# Altium PCB PCB1.PcbDoc
Units mm, origin at the board's own origin, x right, y up, seen from the top; angles counter-clockwise.
Board outline 42.75 x 41.75 mm, 4 copper layers (L1 (Signal), L2 (GND), L3 (GND), L4 (Signal)), stack 1.57 mm thick; 44 components, 39 nets, 193 pads, 136 vias.
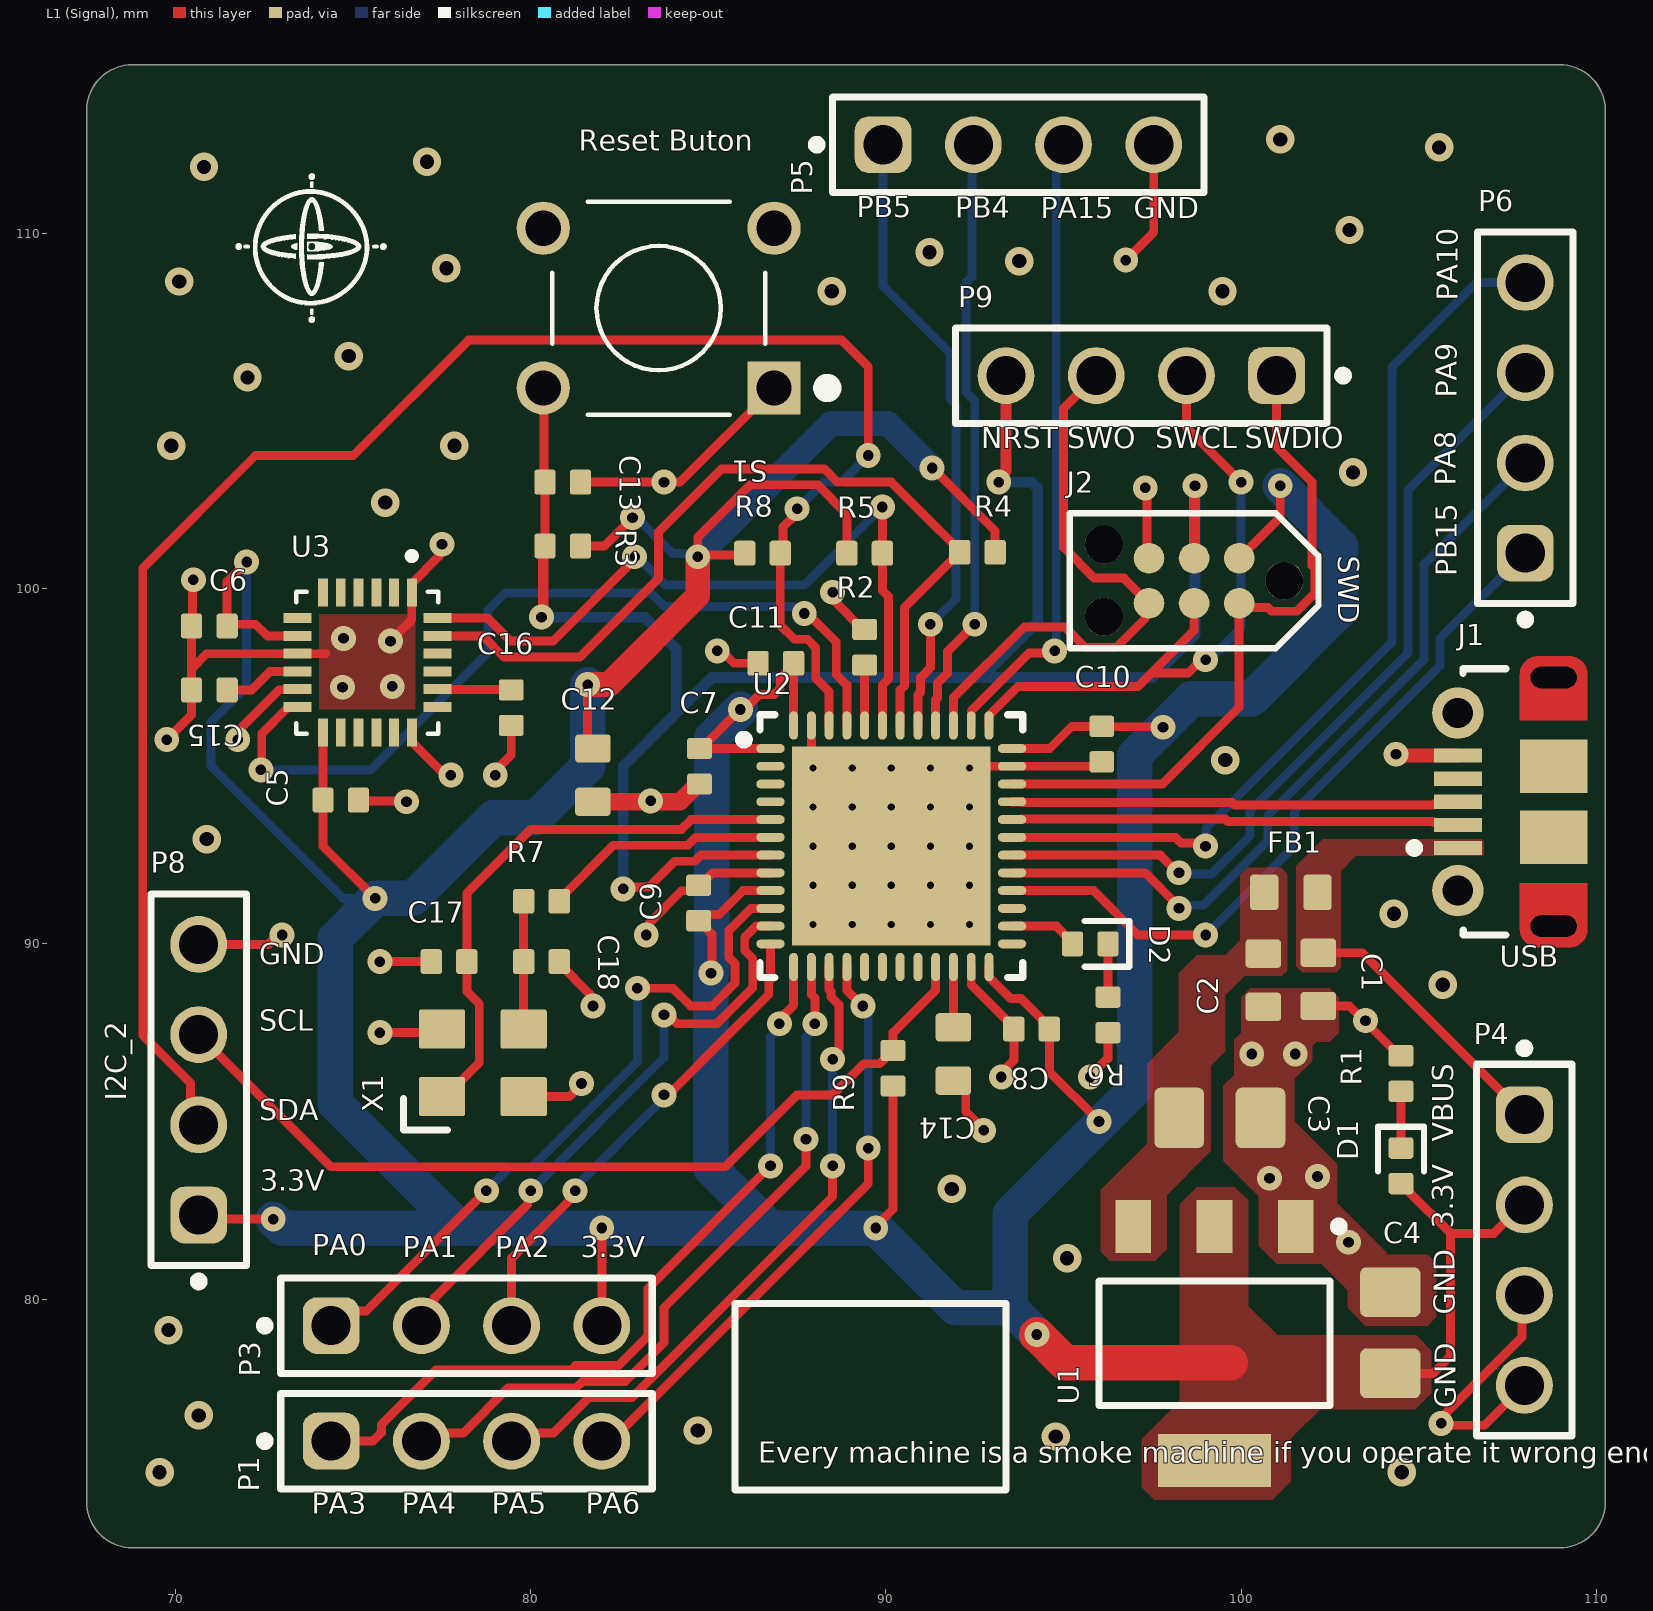
[diagram p0: L1 (Signal) view]
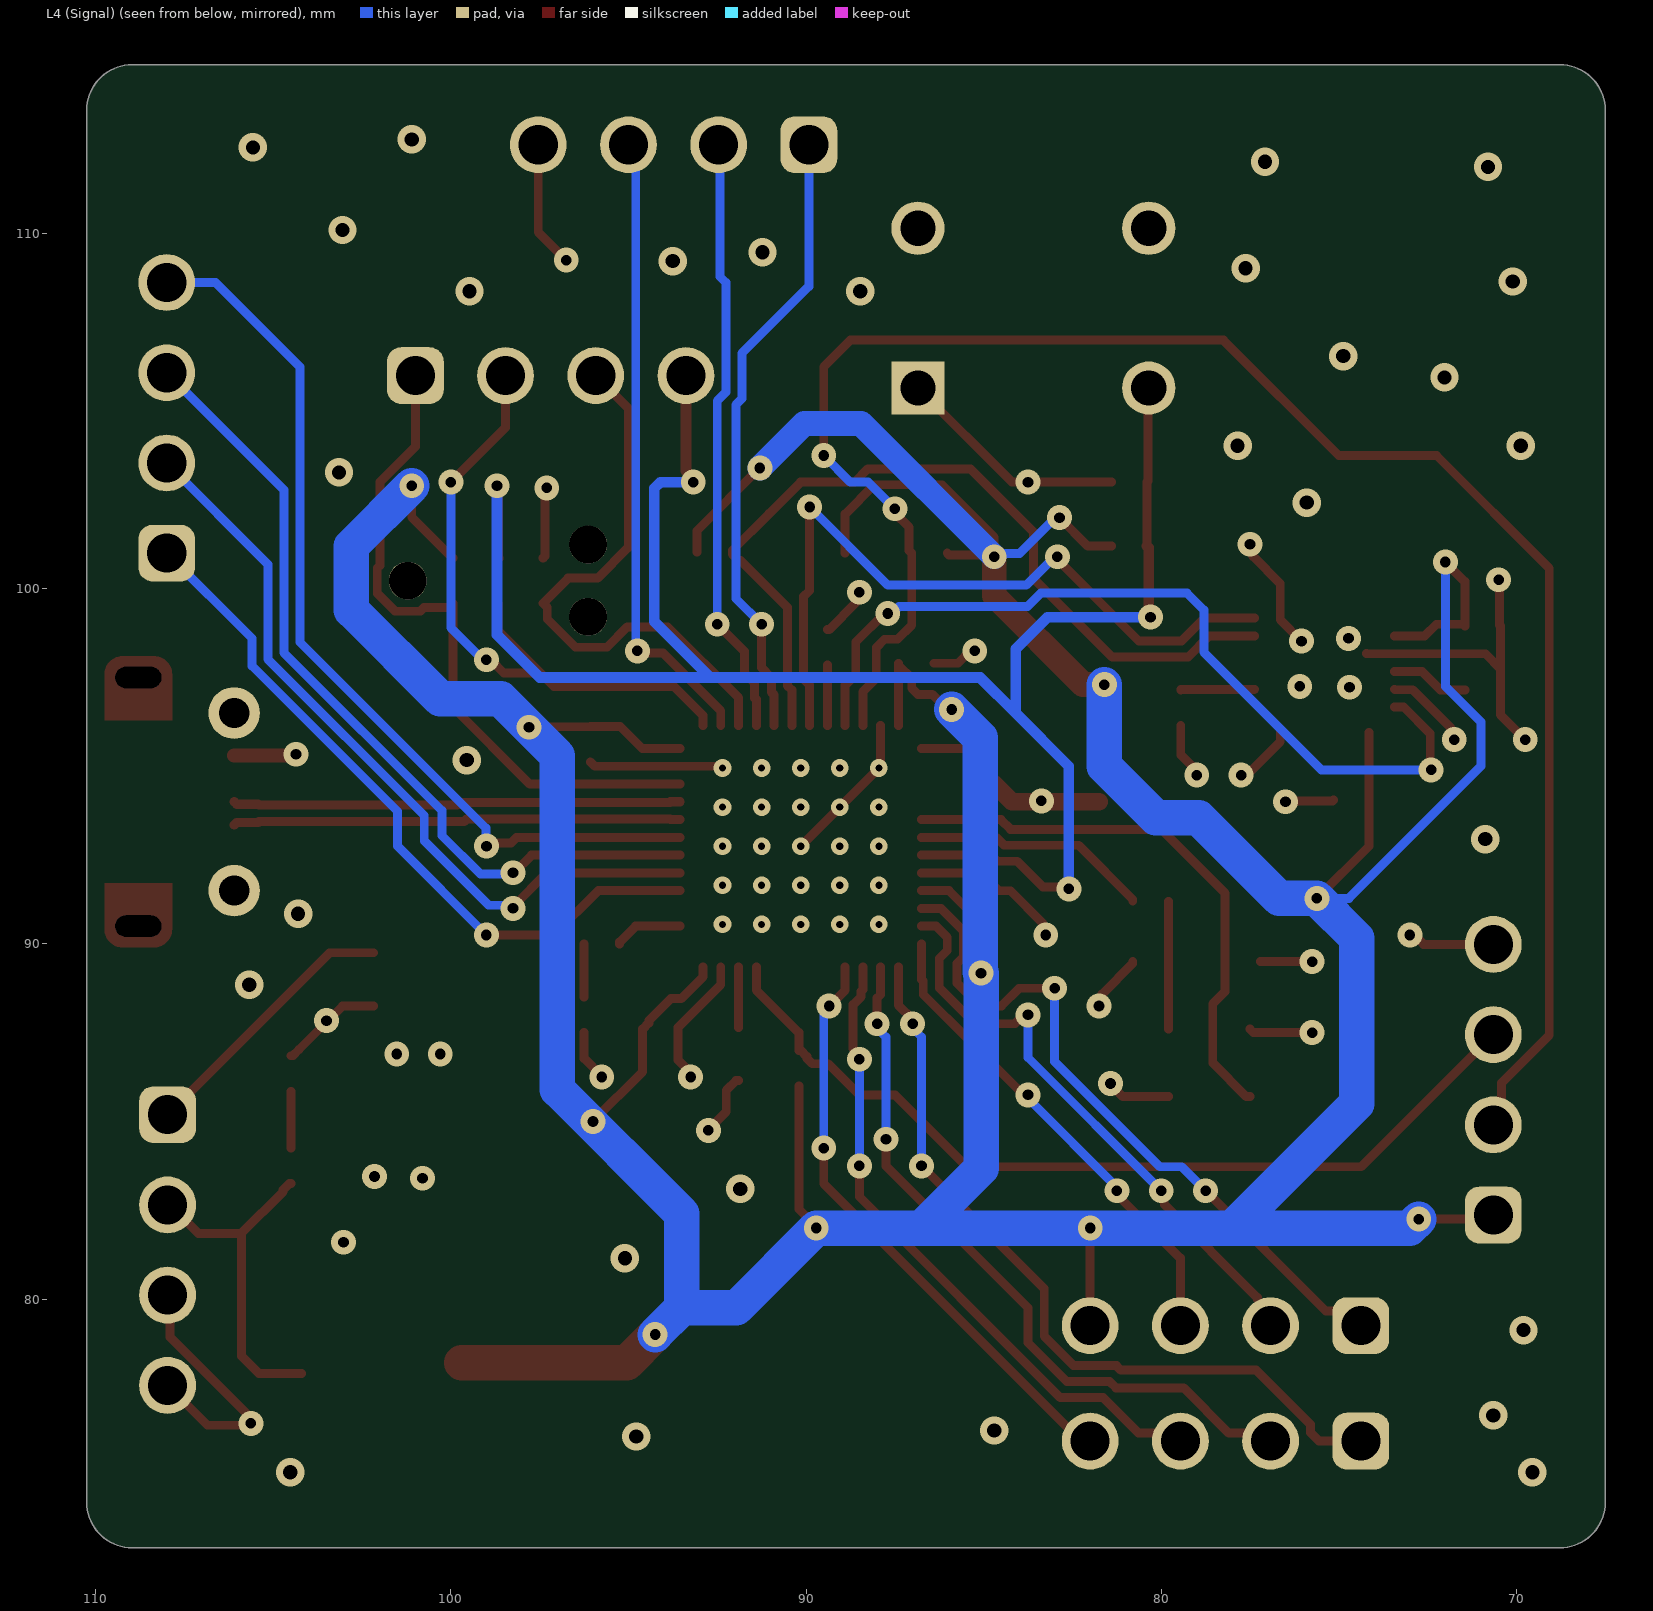
[diagram p1: L4 (Signal) view, seen from below]
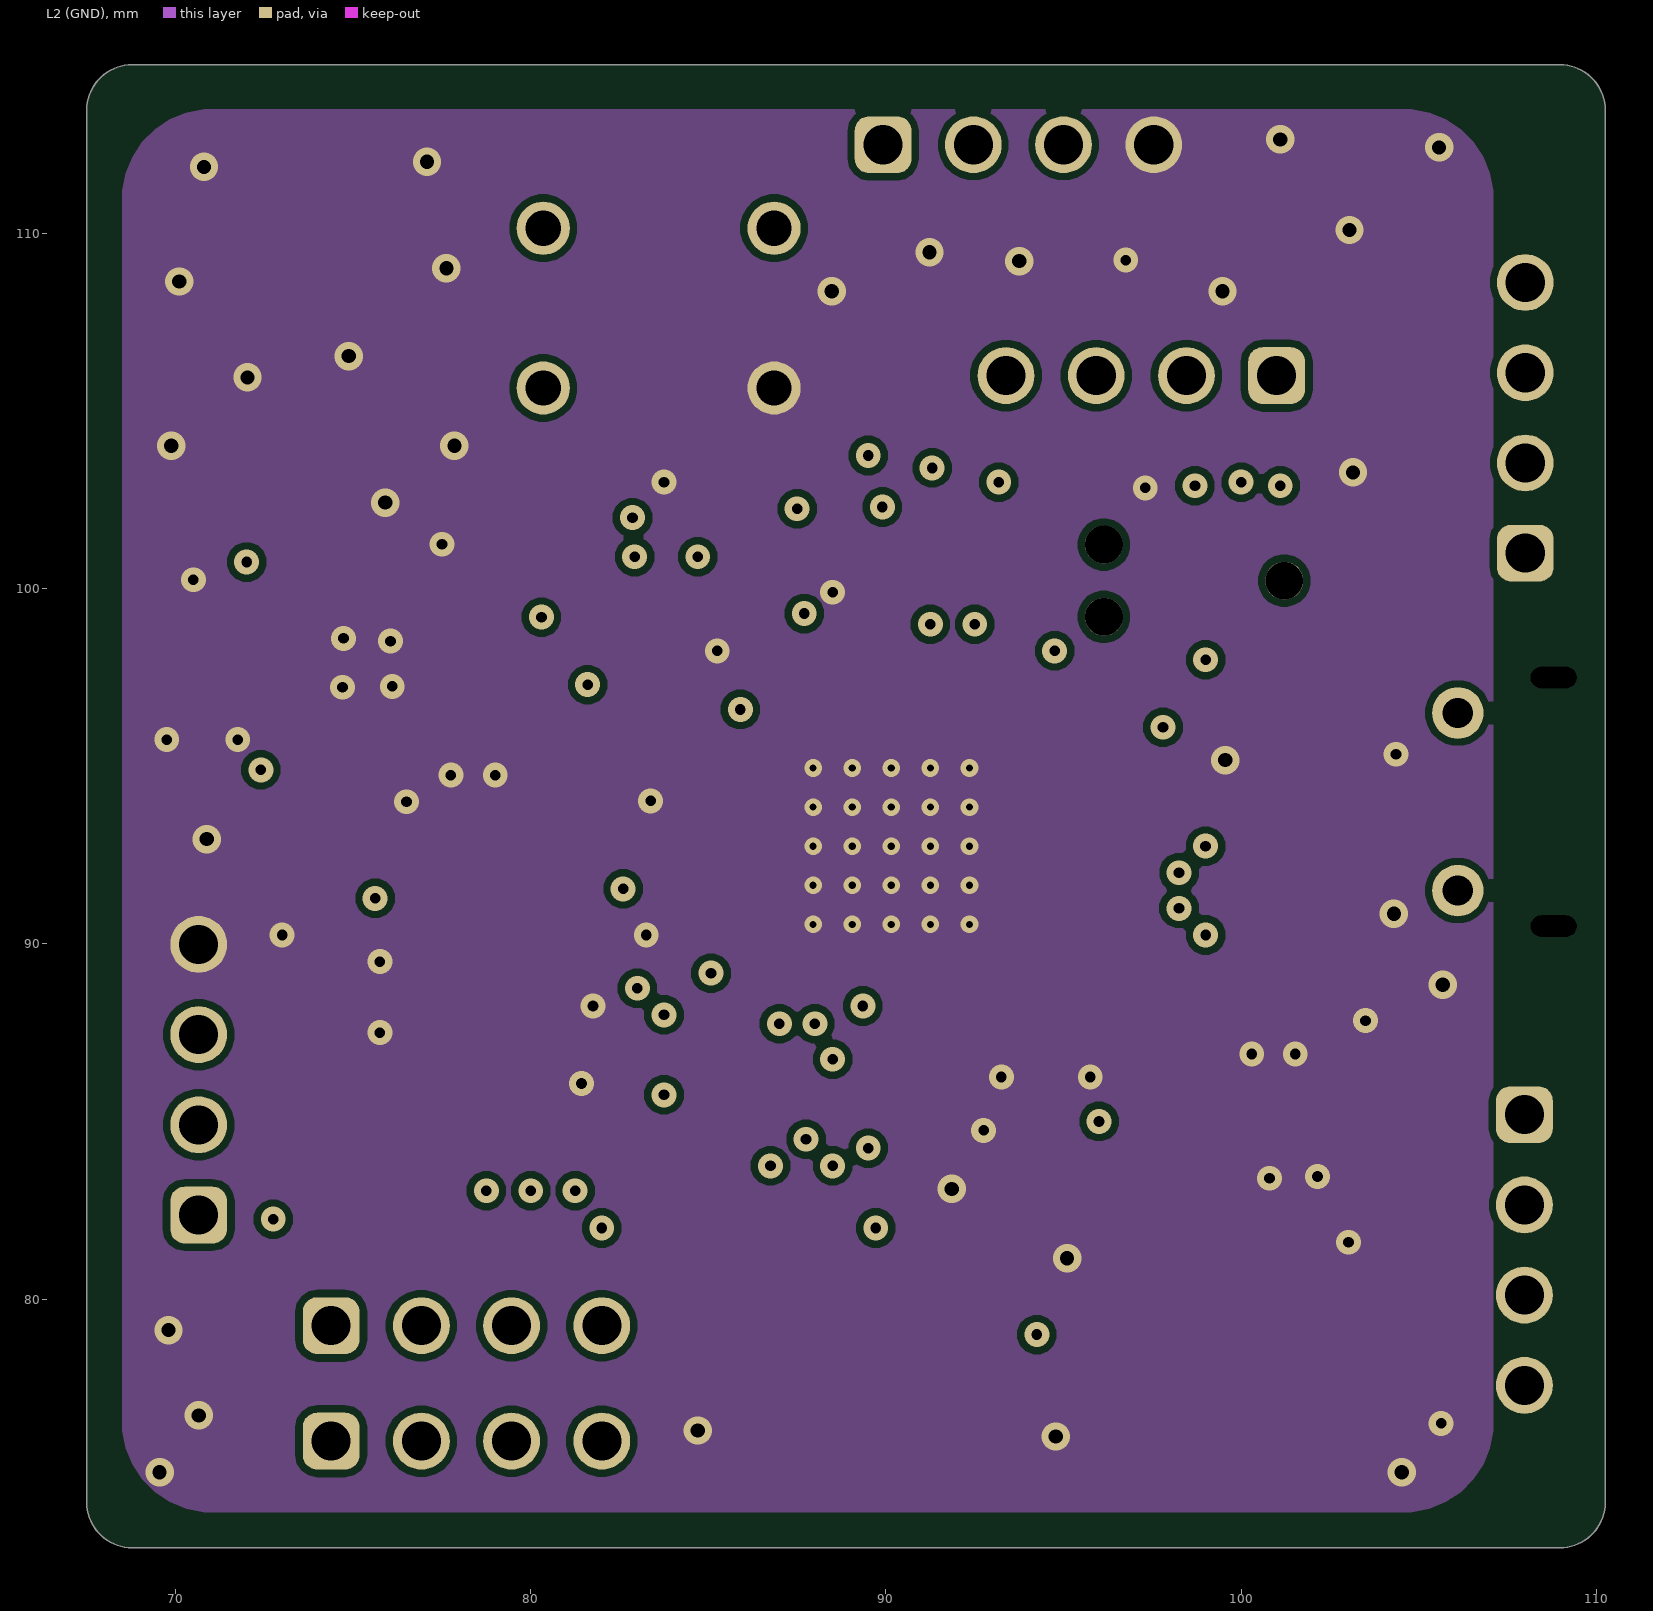
[diagram p2: L2 (GND)]
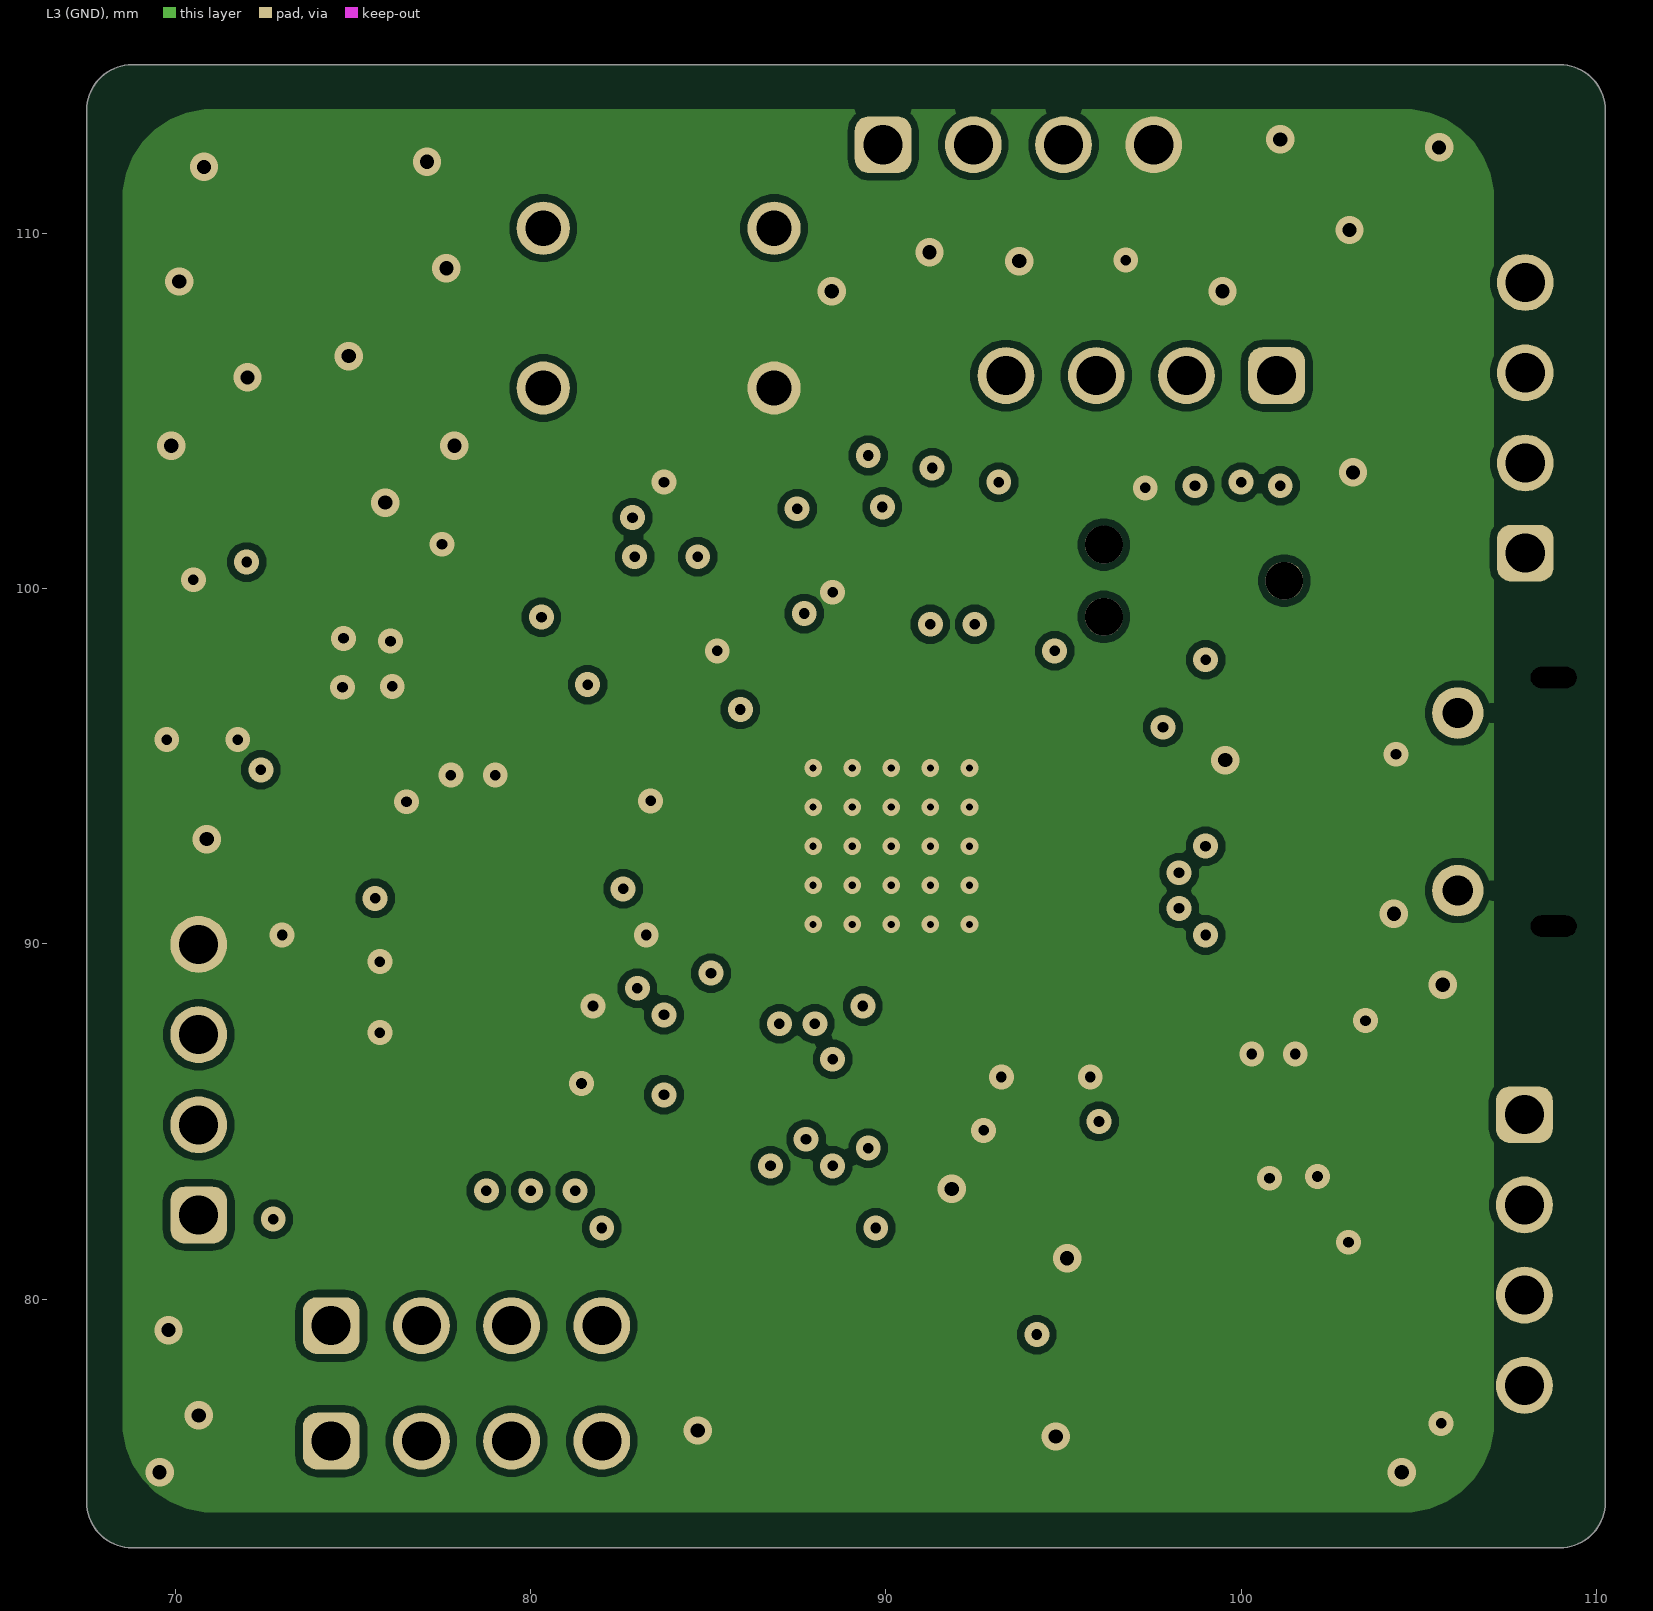
[diagram p3: L3 (GND)]
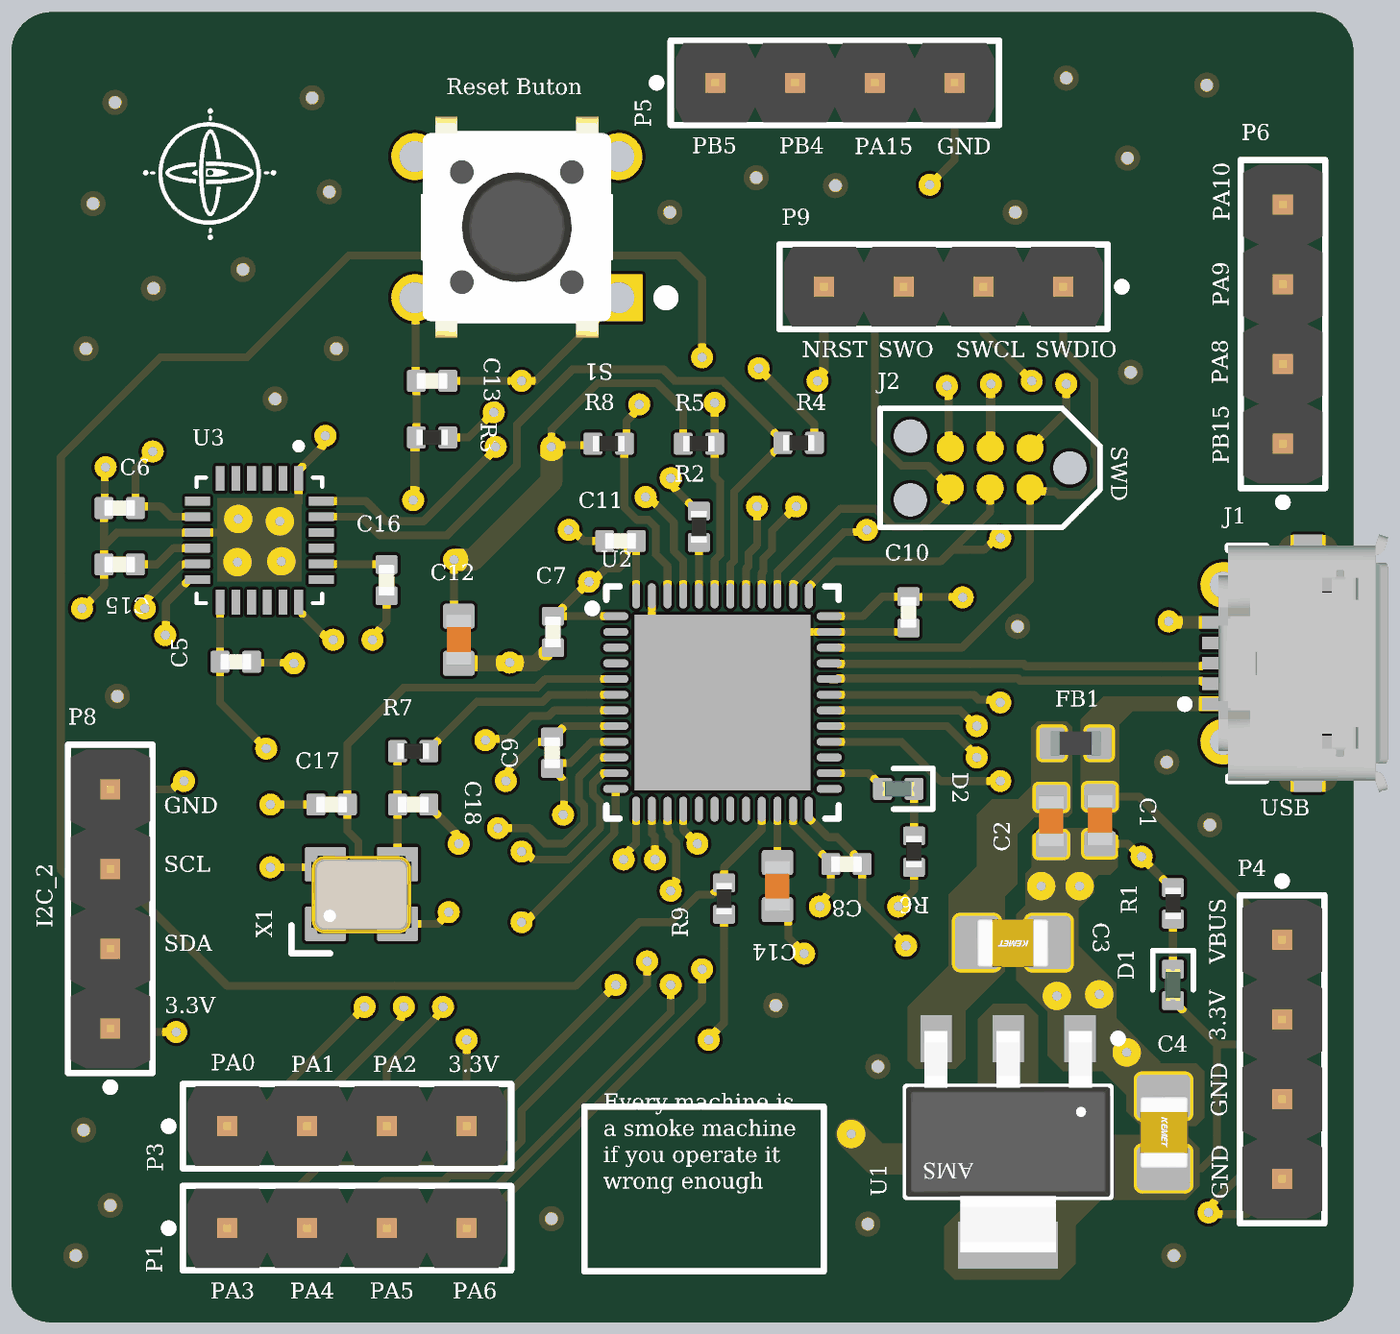
[diagram p4: 3D render of the assembled board from above, using the file's embedded part models]

## Layer stack, top to bottom
Top Solder: solder mask 0.0254, SM-001, Dk 4
L1 (Signal): signal copper 0.035
Dielectric 1: prepreg 0.2, PP-017, Dk 4.6
L2 (GND): signal copper 0.0175
Dielectric 3: core 1.065, Core-039, Dk 4.6
L3 (GND): signal copper 0.0175
Dielectric 5: prepreg 0.2, PP-017, Dk 4.6
L4 (Signal): signal copper 0.035
Bottom Solder: solder mask 0.0254, SM-001, Dk 4

## Board outline
68.77,73 cw(c68.77,74.27) 67.5,74.27 67.5,113.48 cw(c68.77,113.48) 68.77,114.75 108.98,114.75 cw(c108.98,113.48) 110.25,113.48 110.25,74.27 cw(c108.98,74.27) 108.98,73

## Design rules (kind name [scope] priority, off if disabled: settings)
Clearance [All] p1: gap=0.2 ignorepadtopadclearanceinfootprint=FALSE
DiffPairsRouting [All] p1: maxlimit=0.254 minlimit=0.203 mostfreqgap=0.254 toplayer_maxgap=0.203 toplayer_prefgap=0.203 toplayer_minwidth=0.26 toplayer_maxwidth=0.26 toplayer_prefwidth=0.26 bottomlayer_maxgap=0.203 bottomlayer_prefgap=0.203 bottomlayer_minwidth=0.26 bottomlayer_maxwidth=0.26 bottomlayer_prefwidth=0.26 impedanceprofiledriven=TRUE impedanceprofileid={49823D1B-6960-47C4-9E38-969958D2B06B} impedanceprofilevalue=90.000000 maxuncoupledlength=12.7
PolygonConnect [All] p1: connectstyle=Direct reliefconductorwidth=0.254 reliefentries=4 polygonreliefangle="90 Angle" airgapwidth=0.254
RoutingVias [All] p1: holewidth=0.3 width=0.7 viastyle="Through Hole" minholewidth=0.25 minwidth=0.5 maxholewidth=0.4 maxwidth=0.9
SolderMaskExpansion [All] p1: expansion=0.102 istentingtop=FALSE
UnRoutedNet [All] p1: checkbadconnections=TRUE
Width [All] p1: maxlimit=1 minlimit=0.2 preferedwidth=0.3 midlayer1_minwidth=0.254 midlayer1_maxwidth=0.254 midlayer1_prefwidth=0.254 midlayer2_minwidth=0.254 midlayer2_maxwidth=0.254 midlayer2_prefwidth=0.254 minimp=50.000000 maximp=50.000000 favimp=50.000000
28 further rules are at their usual default settings.

## Classes and differential pairs
differential pair class DIFF_USB: USB_D
differential pair USB_D: +USB_D_P -USB_D_N

## Components (designator, comment, footprint, x,y, rotation, side; value= is the part's Value field where it differs from the comment)
C1 "C0603 2.2u" CAP_0603 102.175,89 r90 top
C2 "C0603 2.2u" CAP_0603 100.625,88.975 r90 top
C3 "C0805 22uF" CAP_0805 99.4,85.1 r180 top
C4 "C0805 22uF" CAP_0805 104.2,79.05 r270 top
C5 "C0402 100nF" CAP_0402 74.65,94.05 r0 top
C6 "C0402 10nF" CAP_0402 70.95,98.95 r180 top
C7 "C0402 100nF" CAP_0402 84.75,95 r270 top
C8 "C0402 100nF" CAP_0402 94.1,87.6 r180 top
C9 "C0402 100nF" CAP_0402 84.725,91.15 r90 top
C10 "C0402 100nF" CAP_0402 96.075,95.625 r270 top
C11 "C0402 100nF" CAP_0402 86.9,97.9 r180 top
C12 "C0603 2.2u" CAP_0603 81.75,94.75 r90 top
C13 "C0402 100nF" CAP_0402 80.9,103 r180 top
C14 "C0603 2.2u" CAP_0603 91.9,86.9 r90 top
C15 "C0402 100nF" CAP_0402 70.95,97.15 r180 top
C16 "C0402 2.2nF" CAP_0402 79.45,96.65 r90 top
C17 "C0402" CAP_0402 77.7,89.5 r0 top
C18 "C0402" CAP_0402 80.3,89.5 r180 top
D1 "GREEN" LED_0402_GREEN 104.5,83.75 r90 top
D2 "BLUE" LED_0402_BLUE 95.75,90 r0 top
FB1 "FB0603 120R" FB_0603 101.4,91.45 r180 top
J1 "105017-0001" USB-MICRO-B_V 107.45,94 r90 top
J2 "TC2030-NL" TC2030-NL-FP 98.675,100.225 r180 top
P1 "61300411121" 61300411121 78.19,76 r0 top
P3 "61300411121" 61300411121 78.19,79.25 r0 top
P4 "61300411121" 61300411121 107.975,81.38 r270 top
P5 "61300411121" 61300411121 93.73,112.5 r0 top
P6 "61300411121" 61300411121 108,104.81 r90 top
P8 "61300411121" 61300411121 70.65,86.175 r90 top
P9 "61300411121" 61300411121 97.19,106 r180 top
R1 "R0402 1k" RES_0402 104.5,86.35 r270 top
R2 "R0402 10k" RES_0402 89.4,98.35 r270 top
R3 "R0402 10k" RES_0402 80.9,101.2 r0 top
R4 "R0402 2.2k" RES_0402 92.575,101.025 r0 top
R5 "R0402 2.2k" RES_0402 89.4,101 r180 top
R6 "R0402 1k" RES_0402 96.25,88 r90 top
R7 "R0402 0R" RES_0402 80.3,91.2 r0 top
R8 "R0402 2.2k" RES_0402 86.525,101 r180 top
R9 "R0402 2.2k" RES_0402 90.2,86.5 r270 top
S1 "FSM8JH" SW_FSM8JH 83.6,107.9 r180 top
U1 "AMS1117-3.3" FP-AMS1117-IPC_C 99.25,78.75 r270 top
U2 "STM32F411CEU6" STM-UFQFPN48_L 90.15,92.75 r0 top
U3 "MPU-6050" QFN50P400X400X95-24N 75.4,97.92 r270 top
X1 "24MHz" XTAL_3225 78.65,86.65 r0 top

## Footprints (in the part's own frame and the unit in brackets; to place one, negate y for a bottom-side part, rotate by r counter-clockwise, add the part's x,y. Pads: shape width x height; smd on the part's side, far side on the other; paste and mask are expansions set on the pad)
61300411121 [mm] "Pin Header, pitch 2.54 mm, THT, Vertical, single row, 4p"
  rrect50% 1.6x1.6 hole 1.1: 1(-3.81,0)
  round 1.6 hole 1.1: 2(-1.27,0) 3(1.27,0) 4(3.81,0)
  silkscreen extent -5.8,-1.35 5.23,1.35, body extent -5.08,-1.27 5.08,1.27, height 8.57
CAP_0402 [mm]
  rrect25% 0.6x0.7 smd: 1(-0.5,0) 2(0.5,0)
  body extent -0.5,-0.26 0.5,0.26, height 0.37
CAP_0603 [mm]
  rrect25% 0.8x1 smd: 1(-0.75,0) 2(0.75,0)
  body extent -0.8,-0.4 0.8,0.4, height 0.51
CAP_0805 [mm]
  rrect25% 1.4x1.7 smd: 1(-1.143,0) 2(1.143,0)
  body extent -1.15,-0.76 1.15,0.79, height 1.01
FB_0603 [mm]
  rrect25% 0.8x1 smd: 1(-0.75,0) 2(0.75,0)
  body extent -0.8,-0.4 0.8,0.4, height 0.81
FP-AMS1117-IPC_C [mm]
  rect 1.5x1 smd paste+0 mask+0: 1(-3.295,2.29) 2(-3.295,0) 3(-3.295,-2.29)
  rect 1.5x3.182 smd paste+0 mask+0: 4(3.295,0)
  silkscreen extent -3.42,-3.25 1.75,3.63, body extent -3.9,-3.35 3.9,3.35, height 0.25
LED_0402_BLUE [mm]
  rrect25% 0.6x0.7 smd: A(-0.5,0) K(0.5,0)
  silkscreen extent -0.15,-0.65 1.1,0.65, body extent -0.51,-0.25 0.51,0.25, height 0.45
LED_0402_GREEN [mm]
  rrect25% 0.6x0.7 smd: A(-0.5,0) K(0.5,0)
  silkscreen extent -0.15,-0.65 1.1,0.65, body extent -0.51,-0.25 0.51,0.25, height 0.45
QFN50P400X400X95-24N [mm] "QFN, 24-Leads, Body 4x4mm, Pitch 0.5mm, Thermal Pad 2.7x2.6mm"
  rect 0.79x0.28 smd: 1(-1.97,1.25) 2(-1.97,0.75) 3(-1.97,0.25) 4(-1.97,-0.25) 5(-1.97,-0.75) 6(-1.97,-1.25) 13(1.97,-1.25) 14(1.97,-0.75) 15(1.97,-0.25) 16(1.97,0.25) 17(1.97,0.75) 18(1.97,1.25)
  rect 0.28x0.79 smd: 7(-1.25,-1.97) 8(-0.75,-1.97) 9(-0.25,-1.97) 10(0.25,-1.97) 11(0.75,-1.97) 12(1.25,-1.97) 19(1.25,1.97) 20(0.75,1.97) 21(0.25,1.97) 22(-0.25,1.97) 23(-0.75,1.97) 24(-1.25,1.97)
  silkscreen extent -3.1,-2 2,2
RES_0402 [mm]
  rrect25% 0.6x0.7 smd: 1(-0.5,0) 2(0.5,0)
  body extent -0.5,-0.25 0.5,0.25, height 0.3
STM-UFQFPN48_L [mm] "QFN, 48-Leads, Body 7.1x7.1mm, Pitch 0.5mm, Thermal Pad 5.6x5.6mm, IPC High Density"
  oval 0.8x0.25 smd: 1(-3.4,2.75) 2(-3.4,2.25) 3(-3.4,1.75) 4(-3.4,1.25) 5(-3.4,0.75) 6(-3.4,0.25) 7(-3.4,-0.25) 8(-3.4,-0.75) 9(-3.4,-1.25) 10(-3.4,-1.75) 11(-3.4,-2.25) 12(-3.4,-2.75) 25(3.4,-2.75) 26(3.4,-2.25) 27(3.4,-1.75) 28(3.4,-1.25) 29(3.4,-0.75) 30(3.4,-0.25) 31(3.4,0.25) 32(3.4,0.75) 33(3.4,1.25) 34(3.4,1.75) 35(3.4,2.25) 36(3.4,2.75)
  oval 0.25x0.8 smd: 13(-2.75,-3.4) 14(-2.25,-3.4) 15(-1.75,-3.4) 16(-1.25,-3.4) 17(-0.75,-3.4) 18(-0.25,-3.4) 19(0.25,-3.4) 20(0.75,-3.4) 21(1.25,-3.4) 22(1.75,-3.4) 23(2.25,-3.4) 24(2.75,-3.4) 37(2.75,3.4) 38(2.25,3.4) 39(1.75,3.4) 40(1.25,3.4) 41(0.75,3.4) 42(0.25,3.4) 43(-0.25,3.4) 44(-0.75,3.4) 45(-1.25,3.4) 46(-1.75,3.4) 47(-2.25,3.4) 48(-2.75,3.4)
  rect 5.6x5.6 smd: 49(0,0)
  silkscreen extent -4.27,-3.7 3.7,3.7, body extent -3.55,-3.55 3.55,3.55, height 0.6
SW_FSM8JH [mm]
  rect 1.498x1.498 / inner round 1.498 / far side rect 1.498x1.498 hole 0.99: 1(-3.25,2.25)
  round 1.498 hole 0.99: 2(-3.25,-2.25) 3(3.25,2.25) 4(3.25,-2.25)
  silkscreen extent -4.95,-3 3,3, body extent -3,-3.95 3,3.95, height 9.5
TC2030-NL-FP [mil]
  round 33.98 smd paste-16.99: 1(-50,-25) 2(-50,25) 3(0,-25) 4(0,25) 5(50,-25) 6(50,25)
  round 42.01 hole 42.01 unplated: MH(-100,0) MH(100,-40) MH(100,40)
  silkscreen extent -138,-75 138,75
USB-MICRO-B_V [mm] "USB, MICRO B, Body 7.491x4.695 mm, Pitch 0.65 mm"
  rect 0.4x1.35 smd: 1(-1.3,1.35) 2(-0.65,1.35) 3(0,1.35) 4(0.65,1.35) 5(1.3,1.35)
  round 1.45 hole 0.85: 6(-2.5,1.35) 7(2.5,1.35)
  rrect50% 0x0 hole 0.6 slot 1.3 at 90 deg: 8(-3.5,-1.35) 11(3.5,-1.35)
  rect 1.5x1.9 smd: 9(-1,-1.35) 10(1,-1.35)
  L1 (Signal) circle w0.5: c3.6,-0.9 r0.25
  L1 (Signal) circle w0.5: c3.6,-1.8 r0.25
  L1 (Signal) circle w0.5: c-3.6,-0.9 r0.25
  L1 (Signal) circle w0.5: c-3.6,-1.8 r0.25
  L1 (Signal) region: -2.3,-2.3 -2.3,-0.4 -3.6,-0.4 -3.6,-2.3
  L1 (Signal) region: 2.3,-0.4 2.3,-2.3 3.6,-2.3 3.6,-0.4
  L1 (Signal) region: 3.6,-0.9 3.6,-1.8 4.1,-1.8 4.1,-0.9
  L1 (Signal) region: -3.6,-1.8 -3.6,-0.9 -4.1,-0.9 -4.1,-1.8
  silkscreen extent -3.75,-0.01 3.75,2.7, body extent -4.1,-3.9 4.1,1.5, height 2.67
XTAL_3225 [mm]
  rrect10% 1.3x1.1 smd: 1(-1.15,-0.95) 2(1.15,-0.95) 3(1.15,0.95) 4(-1.15,0.95)
  silkscreen extent -2.23,-1.89 -1,-1, body extent -1.6,-1.28 1.6,1.22, height 0.61

## Part data
C1 C2 C12 C14: library part CAP_0603, "Capacitor SMD 0603"
C3 C4: library part CAP_0805, "Capacitor SMD 0805 16V"
C5 C6 C7 C8 C9 C10 C11 C13 C15 C16: library part CAP_0402, "Capacitor SMD 0402"
C17 C18: library part CAP_0402, "Capacitor SMD 0402  / udemy'e göre 10pf"
D1: library part LED_0402_GREEN, "LED 0402 GREEN SMD"
D2: library part LED_0402_BLUE, "LED 0402 BLUE SMD"
FB1: library part FB_0603, "Ferrite Bead SMD 0603"
J1: library part CMP-2000-05827-1, "Micro-USB B Receptacle, Right Angle, Bottom Mount, Surface Mount, with Solder Tabs, -30 to 85 degC, 5-Pin USB, RoHS, Tape and Reel", Manufacturer=Molex, Package Description="5-Leads USB, Micro B, Body 7.5 x 5 mm, Pitch 0.65 mm", Package Reference=MICRO-B, Package Version="Rev. F, 12/2012", Standard Package=1, Voltage - Max=30V, 3D Model=105017-0001.stp, Catalog Drawings=1050170001, Category=Connectors,Interconnects, Circuits=5, Connector Type=USB-microB, Datasheet URL=http://www.molex.com/elqNow/elqRedir.htm?ref=http://www.molex.com/webdocs/datasheets/pdf/en-us/1050170001_IO_CONNECTORS.pdf, Datasheet Version=03/2016, Family=USB,DVI,HDMIConnectors, Featured Product=Micro-USBConnectorsUSBConnectors, Features=Shielded,SolderRetention, Gender=Receptacle, Ingress Protection=-, Manufacturer URL=http://www.molex.com/, Mating Products=WM17145-ND-CABLEMICROUSBBTOSTDA1.0MWM17147-ND-CABLEMICROUSBBTOSTDA2.0MWM17146-ND-CABLEMICROUSBBTOSTDA1.5M, Mounting Technology=SurfaceMount, Mounting Type=BoardCutout,SurfaceMount,RightAngle, Number of Contacts=5, Online Catalog=Molex-MicroUSB, Other Names=WM1399DKR, Package URL=http://www.molex.com/pdm_docs/sd/1050170001_sd.pdf, Packaging=Digi-Reel®, PCN Assembly/Origin=ResinSupplier21/Oct/2015, RoHS Information=1050170001CertofCompliance, Series=-, Specifications=-
J2: "Tag-Connect No-Solder SWD Debug Connector (No Legs) DO NOT PLACE", Manufacturer=Tag-Connect, Manufacturer Part Number=TC2030-NL-FP
P1 P3 P4 P5 P6 P8 P9: "WR-PHD Pin Header, THT, Vertical, pitch 2.54mm, 1 Row, 4P", Contact Resistance=20mOhm, Manufacturer="Wurth Elektronik", Operating Temperature Max=105°C, Operating Temperature Min=-40°C, Rated Current=3A, Withstanding Voltage=500V, Working Voltage=250V, Category="Board-to-Board Connectors", ComponentLink1Description="Website Link", ComponentLink1URL=https://www.we-online.com/redexpert/article/61300411121?ad, ComponentLink2Description="Datasheet Link", ComponentLink2URL=https://www.we-online.com/redexpert/spec/61300411121?ad, Gender="Pin Header", Manufacturer Part Number=61300411121, Match Code=WR-PHD, Mount="Through Hole", Number of Pins=4, Number of Rows=1, Orientation=Vertical, Packaging=Bag, Pitch=2.54mm
R1 R2 R3 R4 R5 R6 R7 R8 R9: library part RES_0402, "Resistor SMD 0402"
S1: "Tactile Switch SPST-NO Top Actuated Through Hole", Package=None, Availability="In Stock", Check_prices=https://www.snapeda.com/parts/FSM8JH/TE+Connectivity+ALCOSWITCH+Switches/view-part/?ref=eda, MF="TE Connectivity", MP=FSM8JH, Price=None, SnapEDA_Link=https://www.snapeda.com/parts/FSM8JH/TE+Connectivity+ALCOSWITCH+Switches/view-part/?ref=snap
U1: library part CMP-209535-000001-1, "LDO Voltage Regulators 1A, 3.3V", Dropout Voltage=1.1V, Manufacturer="Advanced Monolithic Systems", Max Junction Temp=+125°C, Max Power Dissipation=1.2W, Max Supply Voltage=15V, Nominal Supply Current=5mA, Output Current=1A, Output Voltage=3.3V, Package=AMS1117, Temperature="-40°C to +125°C", Temperature Range Low=-40°C, Automotive=No, Category=IC, ComponentLink2Description=Datasheet, ComponentLink2URL=http://www.advanced-monolithic.com/pdf/ds1117.pdf, Device Class L1="Integrated Circuits (ICs)", Device Class L2="Power Management ICs", Device Class L3="Voltage Regulators - Linear", Height=1.8mm, Ipc Land Pattern Name=SOT229P700X180-4, Lead Free=Yes, Manufacturer Part Number=AMS1117-3.3, Number Of Outputs=1, Octopart=https://octopart.com/ams1117-3.3-advanced+monolithic+systems-25899300, Output Type=Fixed, RoHS=TRUE, Standoff Height=0.64mm, Temperature Range High=+125°C
U2: library part CMP-0243-00165-1, "ARM Cortex-M4 32-bit MCU+FPU, 512 KB Flash, 128 KB RAM, 36 I/Os, 48-Pin UFQFPN, -40 to 85 degC, Tray", I/Os (High Current)=36, Operating Frequency(F) (Processor speed) (MHz)=100, Package Description=UFQFPN48, Package Reference="48-Pin Ultra Thin Fine Pitch Quad Flat No-Lead, 7 x 7 x 0.6 mm Body, 0.5 mm Pitch, Exposed Pad", Supply Voltage(Vcc) min (V)=1.7, ComponentLink1Description="Manufacturer URL", ComponentLink1URL=http://www.st.com/, ComponentLink2Description=Datasheet, ComponentLink2URL=http://www.st.com/st-web-ui/static/active/en/resource/technical/document/datasheet/DM00115249.pdf, Core="ARM Cortex-M4", DatasheetVersion="Rev. 6", FLASH Size (Prog) (kB)=512, Internal RAM Size (kB)=128, Mounting Technology="Surface Mount", Packing=Tray
U3: "MPU-6050 series Accelerometer, Gyroscope, 3 Axis Sensor Evaluation Board", Package="QFN-24 InvenSense", Check_prices=https://www.snapeda.com/parts/MPU-6050/TDK+InvenSense/view-part/?ref=eda, MF="TDK InvenSense", MP=MPU-6050, SnapEDA_Link=https://www.snapeda.com/parts/MPU-6050/TDK+InvenSense/view-part/?ref=snap
X1: library part TSX-3225_24.0000MF15X-AC, "Crystal SMD 24MHz 10PPM 7pF 3225", Manufacturer=Epson, Manufacturer Part Number="TSX-3225 24.0000MF15X-AC"

## Via types
v1: diameter 0.7, hole 0.3, L1 (Signal) to L4 (Signal), 82 vias
v2: diameter 0.8, hole 0.4, L1 (Signal) to L4 (Signal), tented both sides, 29 vias
v3: diameter 0.5, hole 0.2, L1 (Signal) to L4 (Signal), 25 vias

## Nets (pads, with @x,y where several pads share a name; then routed paths per layer and width w, separated by ;. In a path a pad name is that pad's centre, name@x,y a point inside that pad or via, vN(x,y) a via of type N, cw(c..) or ccw(c..) an arc to the next point about the centre after c; other vN are vias at no path point)
+3.3V: C4.2 C5.1 C6.1 C7.1 C8.1 C9.1 C10.1 C11.1 C12.2 D1.A J2.1 P3.4 P4.2 P8.1 R3.2 R4.2 R5.2 R8.2 R9.2 U1.2 U1.4 U2.1 U2.9 U2.24 U2.36 U2.48 U3.8 U3.13 | length 190.3
  L1 (Signal) w0.25: P8.1 70.765,82.25 v1(72.75,82.25) ; v1(72,100.75) 71.45,100.2 C6.1 71.5,99 72.25,99 72.58,98.67 U3.8 ; U3.13 C5.1 74.15,92.75 v1(75.618,91.282) ; R3.2 82.064,101.2 v1(82.864,102) ; v1(81.6,97.3) 81.6,95.65 C12.2 ; P3.4 v1(82,82) ; v1(85.073,89.176) 85.1,89.203 85.1,90.275 84.95,90.425 84.95,90.475 84.775,90.65 C9.1 84.9,90.825 85.3,90.825 85.975,91.5 U2.9 ; R8.2 85.975,100.95 84.75,100.95 v1(84.7,100.9) 84.7,101.45 86.175,102.925 88.075,102.925 88.9,102.1 R5.2 ; U2.1 C7.1 84.8,95.5 v1(85.9,96.6) 86.022,96.6 86.447,97.025 86.85,97.025 87.025,97.2 87.025,97.475 C11.1@87.4,97.85 ; U2.48 C11.1@87.4,97.85 ; C11.1 C11.1@87.4,97.85 ; v1(89.711,82) 89.711,82.047 90.2,82.536 R9.2 ; v1(91.3,103.4) 93.075,101.625 R4.2 ; U2.24 92.9,89.075 93.517,88.458 93.808,88.458 94.425,87.841 94.425,87.775 C8.1 94.6,86.4 v1(96,85) ; U2.36 94.612,95.5 95.238,96.125 C10.1 96.087,96.113 97.788,96.113 v1(97.8,96.1) ; J2.1 101.1,102.015 v1(101.1,102.9) ; C4.2@104.207,77.9 C4.2 105.407,77.907 105.9,78.4 105.9,81.85 ; D1.A 104.55,83.25 104.725,83.075 104.725,83.025 105.9,81.85 ; P4.2 107.913,82.65 107.113,81.85 105.9,81.85
  L1 (Signal) w0.7: v1(81.6,97.3) 82.2,97.3 84.7,99.8 v1(84.7,100.9)
  L1 (Signal) w1: v1(94.25,79) 95.05,78.2 99.7,78.2
  L4 (Signal) w0.25: v1(72,100.75) 72,97.25 71,96.25 71,95 74.718,91.282 v1(75.618,91.282) ; v1@82.75,102 v1(82.864,102) 82.978,102 83.992,100.986 84.614,100.986 v1(84.7,100.9)
  L4 (Signal) w0.7: v1(84.7,100.9) 88.45,104.65 90.05,104.65 v1(91.3,103.4)
  L4 (Signal) w1: v1(72.75,82.25) 73,82 78,82 ; v1(81.6,97.3) 81.6,95 80.15,93.55 78.95,93.55 76.682,91.282 v1(75.618,91.282) 74.5,90.164 74.5,85.5 78,82 ; v1(85.073,89.176) 85.073,83.677 86.75,82 ; v1@85.1,89.2 85.1,95.8 v1(85.9,96.6) ; v1(94.25,79) 93.5,79.75 ; v1(101.1,102.9) 102.8,101.2 102.8,99.4 100.3,96.9 98.6,96.9 97,95.3 97,85.9 93.5,82.4 93.5,79.75 ; 78,82 v1(82,82) 86.75,82 ; 86.75,82 v1(89.711,82) 91.961,79.75 93.5,79.75
+5V: C2.2 C3.2 FB1.2 U1.3
GND: C1.1 C2.1 C3.1 C4.1 C5.2 C6.2 C7.2 C8.2 C9.2 C10.2 C11.2 C12.1 C13.1 C14.1 C15.2 C16.1 C17.1 C18.1 J1.5 J2.5 P4.3 P4.4 P5.4 P8.4 R1.1 R2.1 R6.1 S1.1 U1.1 U2.8 U2.23 U2.35 U2.47 U2.49 U3.1 U3.9 U3.11 U3.18 X1.2 X1.4 | length 78.1
  L1 (Signal) w0.25: v1(69.75,95.75) 70.45,96.45 C15.2 70.45,97.75 ; v1(70.5,100.25) 70.475,100.225 70.475,98.975 C6.2 70.45,97.75 ; P8.4 72.613,89.985 72.878,90.25 v1(73,90.25) ; v1(71.75,95.75) 71.836,95.836 71.836,96.071 72.92,97.155 73.415,97.155 U3.11 ; 74.225,98.175 74.22,98.17 U3.9 70.87,98.17 70.45,97.75 ; C5.2 75.175,94.025 76.475,94.025 v1(76.5,94) ; v1(75.75,87.5) 77.4,87.5 X1.4 ; v1(75.75,89.5) C17.1 ; v1(76.05,98.525) 76.65,99.125 76.65,100.145 77.414,100.909 77.414,101.164 v1(77.5,101.25) ; U3.18 76.65,95.695 77.509,94.836 77.664,94.836 v1(77.75,94.75) ; v1(79,94.75) 79,94.872 79.45,95.322 C16.1 ; X1.2 81.078,85.7 81.43,86.051 v1(81.43,86.07) ; C18.1 80.8,89.45 81.664,88.586 81.664,88.336 v1(81.75,88.25) ; C13.1 84.2,103 S1.1 ; v1(83.25,90.25) 83.336,90.336 83.336,90.586 84.244,91.494 84.569,91.494 C9.2 84.775,91.65 85.125,92 U2.8 ; v1(85.25,98.25) 85.372,98.25 85.722,97.9 C11.2 ; U2.47 87.9,95 v3(87.95,94.95) v3(89.05,93.85) v3(90.15,92.75) ; v1(88.5,99.9) 88.586,99.814 88.586,99.614 89.35,98.85 R2.1 ; C14.1 91.972,86.15 92.247,85.875 92.247,85.272 92.75,84.769 v1(92.75,84.75) ; v3(92.35,94.95) 92.4,95 U2.35 95.95,95 C10.2 ; U2.23 92.4,88.85 93.6,87.65 C8.2 93.6,86.722 93.25,86.372 v1(93.25,86.25) ; v1(95.75,86.25) 95.75,86.275 96.25,86.775 R6.1 ; v1(96.75,109.25) 97.54,110.04 P5.4 ; v1(97.3,102.839) 97.353,102.787 97.353,100.912 J2.5 ; C1.1 103.05,88.25 104.275,87.025 104.45,86.85 R1.1 ; P4.4 106.852,76.447 105.685,76.447 105.554,76.579 107.91,78.935 107.91,80.045 P4.3
  L1 (Signal) w0.4: v1(104.362,95.338) 104.4,95.3 J1.5
  L1 (Signal) w0.5: C12.1 84.2,94 84.7,94.5 C7.2
  other v1: 105.632,76.5 103.025,81.6 100.8,83.4 102.15,83.45 100.3,86.9 101.525,86.9 103.5,87.839 83.375,94.025 74.7,97.225 76.1,97.25 74.725,98.6 83.75,103
  other v2: 69.55,75.125 104.525,75.125 94.779,76.131 84.7,76.3 70.65,76.725 69.8,79.125 95.1,81.15 91.85,83.1 105.675,88.85 104.3,90.85 70.875,92.95 99.55,95.175 75.9,102.425 103.15,103.275 69.875,104.025 77.85,104.025 72.025,105.95 74.875,106.55 88.475,108.375 99.475,108.375 70.1,108.65 77.625,109.025 93.75,109.225 91.225,109.475 103.05,110.1 70.8,111.875 77.077,112.02 105.575,112.425 101.1,112.65
  other v3: 87.95,90.55 89.05,90.55 90.15,90.55 91.25,90.55 92.35,90.55 87.95,91.65 89.05,91.65 90.15,91.65 91.25,91.65 92.35,91.65 87.95,92.75 89.05,92.75 91.25,92.75 92.35,92.75 87.95,93.85 90.15,93.85 91.25,93.85 92.35,93.85 89.05,94.95 90.15,94.95 91.25,94.95
"IMU CPOUT": C16.2 U3.20 | length 2.1
  L1 (Signal) w0.25: U3.20 77.38,97.16 79.44,97.16 C16.2
"IMU REG OUT": C15.1 U3.10 | length 2.2
  L1 (Signal) w0.25: C15.1 72.14,97.15 72.66,97.67 U3.10
IMU_INT: U2.45 U3.12 | length 24.3
  L1 (Signal) w0.25: v1(72.4,94.9) 72.425,94.925 72.425,95.92 73.175,96.67 U3.12 ; v1(87.7,99.3) 87.8,99.3 88.6,98.5 88.6,97.584 88.9,97.284 U2.45
  L4 (Signal) w0.25: v1(72.4,94.9) 75.49,94.9 78.8,98.21 78.8,99.4 79.275,99.875 83.389,99.875 83.764,99.5 87.378,99.5 87.578,99.3 v1(87.7,99.3)
IMU_SCL: R4.1 U2.42 U3.23 | length 24.5
  L1 (Signal) w0.25: U3.23 78.651,98.67 79.246,98.075 81.375,98.075 83.6,100.3 83.6,101.6 85.375,103.375 88.261,103.375 88.636,103 90.155,103 91.04,102.115 91.04,102.11 92.075,101.075 92.075,100.975 91.9,100.8 91.85,100.8 90.525,99.475 90.525,97.273 90.4,97.148 U2.42
IMU_SDA: R5.1 U2.43 U3.24 | length 21.4
  L1 (Signal) w0.25: U3.24 78.787,99.17 79.432,98.525 80.625,98.525 82.925,100.825 v1(82.925,100.9) ; U2.43 89.9,97.284 89.95,97.334 90.075,97.459 90.075,99.775 89.9,99.95 R5.1 v1(89.9,102.3)
  L4 (Signal) w0.25: v1(82.925,100.9) 83,100.9 83.8,100.1 87.7,100.1 v1(89.9,102.3)
LED_PWR_K: D1.K R1.2 | length 1.6
  L1 (Signal) w0.25: D1.K R1.2
"MCU BOOT0": R2.2 U2.44 | length 1.7
  L1 (Signal) w0.25: U2.44 R2.2
"MCU NRST": C13.2 J2.3 P9.4 R3.1 S1.3 U2.7 | length 54.6
  L1 (Signal) w0.25: S1.3 80.375,105.625 80.375,103.025 C13.2 R3.1 ; v1(82.6,91.55) 82.646,91.596 83.325,91.596 84.054,92.325 84.611,92.325 84.786,92.5 U2.7
  L1 (Signal) w0.3: v1(80.3,99.2) 80.35,99.25 80.35,101.15 R3.1 ; v1(93.175,103) 93.175,103.108 93.38,103.313 P9.4 ; J2.3 98.687,100.872 98.687,102.887 v1(98.7,102.9)
  L4 (Signal) w0.3: v1(80.3,99.2) 83.2,99.2 84.1,98.3 84.1,96.5 ; v1(82.6,91.55) 82.6,95 84.1,96.5 ; v1(93.175,103) 94.099,103 94.275,102.824 94.275,99.075 92.7,97.5 ; v1(98.7,102.9) 98.7,98.7 97.5,97.5 92.7,97.5 ; 84.1,96.5 85.1,97.5 92.7,97.5
"MCU OSC IN": C17.2 U2.5 X1.1 | length 15.8
  L1 (Signal) w0.25: X1.1 77.6,85.7 78.55,86.65 78.55,88.312 78.2,88.662 C17.2 78.2,91.425 80,93.225 84.238,93.225 84.513,93.5 U2.5
"MCU OSC OUT": R7.2 U2.6 | length 6.7
  L1 (Signal) w0.25: R7.2 80.8,91.25 82.325,92.775 84.425,92.775 84.65,93 U2.6
"MCU VCAP1": C14.2 U2.22 | length 1.7
  L1 (Signal) w0.25: C14.2 U2.22
MCU_LED_A: D2.A U2.26 | length 1.9
  L1 (Signal) w0.25: U2.26 94.8,90.5 95.25,90.05 D2.A
MCU_LED_K: D2.K R6.2 | length 1.5
  L1 (Signal) w0.25: R6.2 D2.K
MCU_PA0: P3.1 U2.10 | length 20
  L1 (Signal) w0.25: P3.1 74.793,79.663 75.363,79.663 v1(78.75,83.05) ; v1(83,88.75) 84,88.75 84.5,88.25 85.102,88.25 85.748,88.896 85.748,89.454 85.575,89.627 85.575,90.373 86.202,91 U2.10
  L4 (Signal) w0.25: v1(78.75,83.05) 79.425,83.725 80.039,83.725 83,86.686 v1(83,88.75)
MCU_PA1: P3.2 U2.11 | length 17
  L1 (Signal) w0.25: P3.2 76.92,79.615 77.291,79.986 77.291,80.041 79.914,82.664 79.914,82.964 v1(80,83.05) ; v1(83.75,88) 83.872,88 84.122,87.75 85.238,87.75 86.25,88.762 86.25,89.589 86.025,89.814 86.025,90.186 86.339,90.5 U2.11
  L4 (Signal) w0.25: v1(80,83.05) 83.75,86.8 v1(83.75,88)
MCU_PA2: P3.3 U2.12 | length 13.8
  L1 (Signal) w0.25: P3.3 79.46,81.154 81.25,82.944 v1(81.25,83.05) ; v1(83.75,85.75) 83.872,85.75 84.072,85.95 84.075,85.95 85.425,87.3 86.7,88.575 86.7,88.95 86.75,89 U2.12
  L4 (Signal) w0.25: v1(81.25,83.05) 81.25,83.15 83.75,85.65 v1(83.75,85.75)
MCU_PA3: P1.1 U2.13 | length 22.4
  L1 (Signal) w0.25: P1.1 75.555,76 75.795,76.24 75.795,76.466 77.329,78 81.136,78 81.261,78.125 82.466,78.125 83.293,78.952 83.293,80.293 v1(86.75,83.75) ; v1(87,87.75) 87,87.872 87.4,88.272 U2.13
  L4 (Signal) w0.25: v1(86.75,83.75) 86.75,87.378 87,87.628 v1(87,87.75)
MCU_PA4: P1.2 U2.14 | length 20.4
  L1 (Signal) w0.25: P1.2 77.146,76.226 78.095,76.226 79.369,77.5 81.273,77.5 81.448,77.675 82.652,77.675 83.75,78.773 83.75,79.75 87.75,83.75 v1(87.75,84.5) ; U2.14 87.9,88.575 88,88.475 v1(88,87.75)
  L4 (Signal) w0.25: v1(87.75,84.5) 87.75,87.378 88,87.628 v1(88,87.75)
MCU_PA5: P1.3 U2.15 | length 18.5
  L1 (Signal) w0.25: P1.3 79.686,76.226 80.635,76.226 81.634,77.225 82.839,77.225 88.5,82.886 v1(88.5,83.75) ; U2.15 88.4,88.711 88.45,88.661 88.45,88.514 88.675,88.289 88.675,87.047 88.5,86.872 v1(88.5,86.75)
  L4 (Signal) w0.25: v1(88.5,83.75) v1(88.5,86.75)
MCU_PA6: P1.4 U2.16 | length 16.9
  L1 (Signal) w0.25: P1.4 82.25,76 89.5,83.25 v1(89.5,84.25) ; U2.16 88.9,88.7 v1(89.35,88.25)
  L4 (Signal) w0.25: v1(89.35,88.25) 89.35,88.128 89.5,87.978 v1(89.5,84.25)
MCU_PA8: P6.2 U2.29 | length 22.1
  L1 (Signal) w0.25: U2.29 97.3,92 98.25,91.05 v1(98.25,91)
  L4 (Signal) w0.25: v1(98.25,91) 98.336,91.086 98.937,91.086 100.75,92.899 100.75,93.614 105.15,98.014 105.15,100.69 P6.2
MCU_PA9: P6.3 U2.30 | length 23.6
  L1 (Signal) w0.25: U2.30 97.725,92.5 98.222,92.002 v1(98.252,92.002)
  L4 (Signal) w0.25: v1(98.252,92.002) 98.285,91.969 99.17,91.969 100.25,93.049 100.25,93.75 104.7,98.2 104.7,102.78 P6.3
MCU_PA10: P6.4 U2.31 | length 26
  L1 (Signal) w0.25: U2.31 98.148,93 98.31,92.838 98.912,92.838 v1(98.998,92.752)
  L4 (Signal) w0.25: v1(98.998,92.752) 99.013,92.767 99.013,93.263 104.25,98.5 104.25,106.25 106.62,108.62 P6.4
MCU_PA15: P5.3 U2.38 | length 17.8
  L1 (Signal) w0.25: U2.38 92.4,96.561 94.025,98.186 94.686,98.186 v1(94.75,98.25)
  L4 (Signal) w0.25: v1(94.75,98.25) 94.795,98.295 94.795,112.295 P5.3
MCU_PB4: P5.2 U2.40 | length 17
  L1 (Signal) w0.25: U2.40 91.4,96.875 91.45,96.925 91.45,97.336 91.729,97.616 91.729,98.229 v1(92.5,99)
  L4 (Signal) w0.25: P5.2 92.425,112.465 92.425,108.79 92.255,108.62 92.255,105.534 92.5,105.289 v1(92.5,99)
MCU_PB5: P5.1 U2.41 | length 17.6
  L1 (Signal) w0.25: U2.41 90.9,97.012 90.975,97.087 90.975,97.498 91.25,97.773 v1(91.25,99)
  L4 (Signal) w0.25: P5.1 89.92,108.511 91.805,106.626 91.805,105.348 91.975,105.178 91.975,99.725 v1(91.25,99)
MCU_PB9_OUT_SDA: P8.2 R8.1 U2.46 | length 51.9
  L1 (Signal) w0.25: P8.2 70.424,85.131 70.424,86.08 69.075,87.429 69.075,100.575 72.25,103.75 75,103.75 78.25,107 88.75,107 89.5,106.25 v1(89.5,103.75) ; v1(87.5,102.25) 87.5,102.128 87.097,101.725 87.097,101.072 R8.1 87.025,98.975 87.425,98.575 87.791,98.575 88.025,98.341 88.025,97.475 88.4,97.1 U2.46
  L4 (Signal) w0.25: v1(87.5,102.25) 88.25,103 88.75,103 v1(89.5,103.75)
MCU_PB10_OUT_SCL: P8.3 R9.1 U2.21 | length 25.3
  L1 (Signal) w0.25: P8.3 74.37,83.725 85.475,83.725 87.5,85.75 88.5,85.75 89.375,86.625 89.825,86.625 89.975,86.775 89.975,86.825 90.15,87 R9.1 90.2,87.5 91.4,88.7 U2.21
MCU_PB15: P6.1 U2.28 | length 20.4
  L1 (Signal) w0.25: U2.28 95.846,91.5 97.096,90.25 v1(99,90.25)
  L4 (Signal) w0.25: v1(99,90.25) 101.5,92.75 101.5,93.727 105.6,97.827 105.6,98.6 P6.1
MCU_SWCL: J2.4 P9.2 U2.37 | length 18.6
  L1 (Signal) w0.25: U2.37 92.9,96.425 93.725,97.25 97.1,97.25 97.475,97.625 ; P9.2 98.46,104.54 v1(100,103) ; J2.4 98.675,98.825 97.475,97.625 ; v1(99,98) 98.878,98 98.503,97.625 97.475,97.625
  L4 (Signal) w0.25: v1(99,98) 99.1,98 100,98.9 v1(100,103)
MCU_SWDIO: J2.2 P9.1 U2.34 | length 19.2
  L1 (Signal) w0.25: U2.34 97.775,94.5 99.945,96.67 J2.2 100.061,99.474 100.751,99.474 100.859,99.367 101.571,99.367 102.073,99.869 102.073,100.581 102,100.654 102,103 101,104 P9.1
MCU_SWO: J2.6 P9.3 U2.39 | length 16.3
  L1 (Signal) w0.25: U2.39 91.9,96.925 93.9,98.925 95.03,98.925 95.604,98.35 96.491,98.35 97.288,99.148 97.288,99.473 J2.6 96.699,100.296 95.866,100.296 95,101.162 95,105.08 P9.3
USB_D_N: J1.2 U2.32 | length 12.6
  L1 (Signal) w0.26: U2.32 93.815,93.5 93.833,93.518 99.555,93.518 99.63,93.443 105.403,93.443 105.426,93.42 106.03,93.42 J1.2
USB_D_P: J1.3 U2.33 | length 12.6
  L1 (Signal) w0.26: U2.33 93.815,94 93.833,93.982 99.747,93.982 99.822,93.907 105.403,93.907 105.426,93.93 106.03,93.93 J1.3
VBUS: C1.2 FB1.1 J1.1 P4.1 | length 7.7
  L1 (Signal) w0.25: C1.2 103.415,89.75 P4.1
"XTAL IN": C18.2 R7.1 X1.3 | length 3.6
  L1 (Signal) w0.25: X1.3 C18.2 R7.1
pads on no net: J1.4 J1.6 J1.7 J1.8 J1.9 J1.10 J1.11 J2.MH S1.2 S1.4 U2.2 U2.3 U2.4 U2.17 U2.18 U2.19 U2.20 U2.25 U2.27 U3.2 U3.3 U3.4 U3.5 U3.6 U3.7 U3.14 U3.15 U3.16 U3.17 U3.19 U3.21 U3.22

## Polygon pours and split planes (outlines as drawn)
GND on L1 (Signal) "GND_L01_P006" (solid, pour order 6): 74.05,99.275 74.05,96.6 76.75,96.6 76.75,99.275
+3.3V on L1 (Signal) "+3.3V_L01_P002" (solid, pour order 2): 100.875,74.35 101.4,74.875 101.4,76.075 102.225,76.9 104.9,76.9 105.35,77.35 105.35,78.55 104.925,78.975 101.025,78.975 100.2,79.8 100.2,82.775 99.825,83.15 98.75,83.15 98.275,82.675 98.275,77.125 97.2,76.05 97.2,74.7 97.55,74.35
VBUS on L1 (Signal) "VBUS_L01_P000" (solid, pour order 0): 106.838,92.512 106.8,92.475 103.225,92.475 102.8,92.05 102.8,89.325 102.675,89.2 101.725,89.2 101.55,89.375 101.55,92.2 102.3,92.95 106.778,92.95 106.838,92.89
GND on L1 (Signal) "GND_L01_P003" (solid, pour order 3): 104.1,81.25 104.1,81.3 102.7,82.7 102.7,83.8 101.5,85 101.5,86.2 102,86.7 102,87.125 102.125,87.25 102.5,87.25 102.75,87.5 102.75,88.5 102.5,88.75 100.25,88.75 100,88.5 100,87.5 99.8,87.3 99.8,86.3 99.5,86 99.5,83.9 100.5,82.9 100.5,81.5 101,81 102.25,81 103,80.25 103,79.75 103.5,79.25 105.25,79.25 105.5,79.5 105.5,81 105.25,81.25
+5V on L1 (Signal) "+5V_L01_P001" (solid, pour order 1): 99.55,89.675 98.75,89.675 98.25,89.175 98.25,87.525 97.35,86.625 97.35,84.375 96.05,83.075 96.05,81.325 96.3,81.075 97.575,81.075 97.9,81.4 97.9,82.925 99.15,84.175 99.15,86.575 99.55,86.975 99.55,88.55 100.1,89.1 101.15,89.1 101.3,89.25 101.3,91.975 101.125,92.15 100.175,92.15 99.975,91.95 99.975,90.1
GND on L2 (GND) "GND_L02_P004" (solid, pour order 4): 68.5,110.96 cw(c71.04,110.96) 71.04,113.5 104.56,113.5 cw(c104.56,110.96) 107.1,110.96 107.1,76.54 cw(c104.56,76.54) 104.56,74 71.04,74 cw(c71.04,76.54) 68.5,76.54 68.5,95.1
GND on L3 (GND) "GND_L03_P005" (solid, pour order 5): 68.51,110.96 cw(c71.05,110.96) 71.05,113.5 104.57,113.5 cw(c104.57,110.96) 107.11,110.96 107.11,76.54 cw(c104.57,76.54) 104.57,74 71.05,74 cw(c71.05,76.54) 68.51,76.54 68.51,95.1

## Silkscreen, mask and mechanical layers (free items; w line width, h text height)
Top Overlay:
  drawing of 26 lines, arcs and shapes, not listed
  text "Reset Buton" at 81.35,112.132 h1
  text "PB5" at 89.178,110.257 h1
  text "PB4" at 91.953,110.252 h1
  text "PA15" at 94.353,110.232 h1
  text "GND" at 96.978,110.232 h1
  text "PA10" at 106.293,108.103 h1 r90
  text "PA9" at 106.268,105.378 h1 r90
  text "NRST" at 92.678,103.757 h1
  text "SWO" at 95.103,103.757 h1
  text "SWCL" at 97.578,103.757 h1
  text "SWDIO" at 100.103,103.757 h1
  text "PA8" at 106.243,102.903 h1 r90
  text "SWD" at 102.532,100.925 h1 r270
  text "PB15" at 106.268,100.353 h1 r90
  text "GND" at 72.353,89.232 h1
  text "USB" at 107.278,89.157 h1
  text "SCL" at 72.353,87.357 h1
  text "I2C_2" at 68.805,85.578 h1 r90
  text "SDA" at 72.353,84.832 h1
  text "VBUS" at 106.168,84.425 h1 r90
  text "3.3V" at 72.378,82.857 h1
  text "3.3V" at 106.168,81.975 h1 r90
  text "PA0" at 73.85,81.032 h1
  text "PA1" at 76.4,80.978 h1
  text "PA2" at 79.003,80.977 h1
  text "3.3V" at 81.403,80.982 h1
  text "GND" at 106.218,79.553 h1 r90
  text "GND" at 106.243,76.928 h1 r90
  text "Every machine is a smoke machine if you operate it wrong enough" at 86.4,75.2 h1
  text "PA3" at 73.831,73.757 h1
  text "PA4" at 76.368,73.752 h1
  text "PA5" at 78.905,73.757 h1
  text "PA6" at 81.547,73.757 h1
Mechanical 1:
  lines w0.813: 67.5,74.27 ccw(c68.77,74.27) 68.77,73 108.98,73 ccw(c108.98,74.27) 110.25,74.27 110.25,113.48 ccw(c108.98,113.48) 108.98,114.75 95,114.75 68.77,114.75 ccw(c68.77,113.48) 67.5,113.48 67.5,74.27

## Text inside footprints (layer, text, board x,y; h text height)
D1: Mechanical 13 "+" at 103.992,81.867 h0.5 r90
D2: Mechanical 13 "+" at 93.867,90.508 h0.5
J1: Mechanical 1 "PCB EDGE" at 110.35,86.8 h0.3 r90